# Altium PCB PCB_FB_TOF.PcbDoc
Units mm, origin at the board's own origin, x right, y up, seen from the top; angles counter-clockwise.
Board outline 6.73 x 3.3 mm, 2 copper layers (Top Layer, Bottom Layer); 5 components, 5 nets, 23 pads, 5 vias.
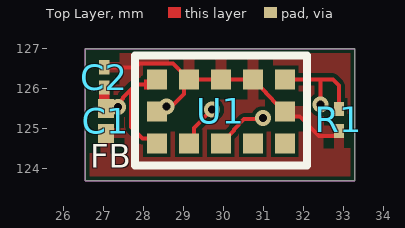
[diagram p0: Top Layer view]
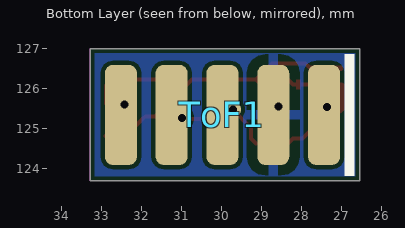
[diagram p1: Bottom Layer view, seen from below]

## Layer stack, top to bottom
Top Solder: solder mask 0.0102, Solder Resist, Dk 3.5
Top Layer: signal copper 0.0356
Dielectric 1: dielectric 0.32, FR-4, Dk 4.8
Bottom Layer: signal copper 0.0356
Bottom Solder: solder mask 0.0102, Solder Resist, Dk 3.5

## Board outline
26.543,123.698 33.274,123.698 33.274,127 26.543,127

## Design rules (kind name [scope] priority, off if disabled: settings)
Clearance [All] p1: gap=0.1 ignorepadtopadclearanceinfootprint=TRUE except(0: Arc-Hole Track-Hole SMDPad-Hole THPad-Hole Via-Hole Fill-Hole Poly-Hole Region-Hole Text-Hole)
PolygonConnect [All] p1: connectstyle=Relief reliefconductorwidth=0.254 reliefentries=4 polygonreliefangle="90 Angle" airgapwidth=0.254
RoutingVias [All] p1: holewidth=0.2 width=0.4 viastyle="Through Hole" minholewidth=0.2 minwidth=0.4 maxholewidth=0.8 maxwidth=1
SolderMaskExpansion [All] p1: expansion=0.102 istentingtop=FALSE
Width [All] p1: maxlimit=0.254 minlimit=0.1 preferedwidth=0.1 minimp=50.000000 maximp=50.000000 favimp=50.000000
30 further rules are at their usual default settings.

## Components (designator, comment, footprint, x,y, rotation, side; value= is the part's Value field where it differs from the comment)
C1 "4.7uF" FP-GRM035-0_09-IPC_B 27.058,125.2 r90 top
C2 "100nF" FP-C0603-030-0_03-IPC_C 27.013,126.286 r90 top
R1 "CRCW020110K0FNED" RESC0603X28X15LL05T05 32.879,125.223 r270 top value=10k
ToF1 "ToF_Front_Back" ToF_Front_Back 29.972,124.079 r180 bottom
U1 "ToF - VL53L1X" TOF 29.934,125.438 r90 top

## Footprints (in the part's own frame and the unit in brackets; to place one, negate y for a bottom-side part, rotate by r counter-clockwise, add the part's x,y. Pads: shape width x height; smd on the part's side, far side on the other; paste and mask are expansions set on the pad)
FP-C0603-030-0_03-IPC_C [mm]
  rect 0.356x0.263 smd paste+0 mask+0: 1(-0.253,0) 2(0.253,0)
  body extent -0.53,-0.27 0.53,0.27, height 0.25
FP-GRM035-0_09-IPC_B [mm]
  rect 0.477x0.403 smd paste+0 mask+0: 1(-0.313,0) 2(0.313,0)
  body extent -0.7,-0.35 0.7,0.35, height 0.25
RESC0603X28X15LL05T05 [mm] "Chip Resistor, 2-Leads, Body 0.60x0.30mm, IPC High Density"
  rect 0.35x0.25 smd: 1(-0.275,0) 2(0.275,0)
  body extent -0.33,-0.17 0.32,0.18, height 0.28
TOF [mm]
  rect 0.5x0.5 smd: 1(0.8,1.6) 2(0.8,0.8) 3(0.8,0) 4(0.8,-0.8) 5(0.8,-1.6) 6(0,-1.6) 7(-0.8,-1.6) 8(-0.8,-0.8) 9(-0.8,0) 10(-0.8,0.8) 11(-0.8,1.6) 12(0,1.6)
  Top Layer region: 0.55,1.8 0.8,1.8 0.8,1.93 0.55,1.93
  silkscreen extent -1.35,-2.15 1.4,2.15, body extent -1.35,-2.42 1.4,2.4, height 1.6
ToF_Front_Back [mm] "1mm pitch"
  rrect50% 0.8x2.5 smd: 1(2.54,1.27) 2(1.27,1.27) 3(0,1.27) 4(-1.27,1.27) 5(-2.54,1.27)

## Part data
C1: library part CMP-06035-019701-1, "Chip Multilayer Ceramic Capacitors for General Purpose, 0201, 4.7uF, X5R, 15%, 20%, 6.3V", Case Code (Imperial)=0201, Case Code (Metric)=0603, Dielectric=X5R, Max Operating Temperature=85°C, Min Operating Temperature=-55°C, Tolerance=20%, Voltage Rating=6.3V, Capacitance=4.7uF, Case/Package=0201, Length=0.024inch, Mount="Surface Mount", Packaging="Tape and Reel", Thickness=0.022inch, Voltage Rating (DC)=6.3V, Width=0.012inch
C2: library part CMP-08246-005139-1, "Multilayer Ceramic Capacitors 100nF ±10% 25V X5R SMD 0201", Case Code (Imperial)=0201, Case Code (Metric)=0603, Dielectric=X5R, Dielectric Material=Ceramic, Max Operating Temperature=85°C, Min Operating Temperature=-55°C, Package Quantity=15000, Tolerance=10%, Voltage Rating=25V, Capacitance=100nF, Case/Package=0201, Depth=0.3mm, Height=0.3mm, Lead Free="Lead Free", Length=0.6mm, Mount="Surface Mount", Packaging="Tape and Reel", REACH SVHC="No SVHC", RoHS Compliant=Yes, Series=C, Termination=SMD/SMT, Thickness=0.013inch, Voltage Rating (DC)=25V, Weight=6E-06oz, Width=0.012inch
R1: library part CMP-2004-00016-1, Manufacturer="Vishay Dale", Part Number=CRCW020110K0FNED
ToF1: Supplier Part Number 1=110990442-ND, Supplier 1=Digi-Key
U1: library part VL53L1X, Manufacturer=STMicroelectronics, Manufacturer Part Number=VL53L1CXV0FY/1, Supplier Part Number 1=497-17764-6-ND, ComponentLink1Description=http://www.farnell.com/datasheets/2600105.pdf?src-supplier=Farnell, ComponentLink1URL=http://www.farnell.com/datasheets/2600105.pdf?src-supplier=Farnell, ComponentLink2Description=http://www.st.com/content/ccc/resource/technical/document/datasheet/group3/7d/85/c8/95/fb/3b/4e/2d/DM00452094/files/DM00452094.pdf/jcr:content/translations/en.DM00452094.pdf?src-supplier=Digi-Key, ComponentLink2URL=http://www.st.com/content/ccc/resource/technical/document/datasheet/group3/7d/85/c8/95/fb/3b/4e/2d/DM00452094/files/DM00452094.pdf/jcr:content/translations/en.DM00452094.pdf?src-supplier=Digi-Key, Pricing 1="1 = 7.07000, 10 = 6.38600, 100 = 5.28660, 500 = 4.60350, 1000 = 4.00950 (USD)", RoHS=No, Stock 1=5939, Supplier 1=Digi-Key

## Via types
v1: diameter 0.4, hole 0.2, Top Layer to Bottom Layer, tented both sides, 5 vias

## Nets (pads, with @x,y where several pads share a name; then routed paths per layer and width w, separated by ;. In a path a pad name is that pad's centre, name@x,y a point inside that pad or via, vN(x,y) a via of type N, cw(c..) or ccw(c..) an arc to the next point about the centre after c; other vN are vias at no path point)
2V8: C1.2 C2.1 ToF1.1 U1.1 U1.11 | length 3.9
  Top Layer w0.1: v1(27.36,125.552) 27.36,125.633 27.486,125.759 27.486,125.784 27.686,125.984 ; U1.11 28.211,124.761 27.972,124.761 27.686,125.047 27.686,125.984 ; U1.1 28.211,126.115 27.817,126.115 27.686,125.984
  Top Layer w0.254: C2.1 27.017,126.028 27.017,125.554 C1.2 27.077,125.533 27.341,125.533 v1(27.36,125.552)
GND: C1.1 C2.2 R1.2 ToF1.2 U1.2 U1.3 U1.4 U1.6 U1.12 | length 8
  Top Layer w0.1: C2.2@27.013,126.492 C2.2 27.794,126.539 27.893,126.638 28.734,126.638 U1.2 ; U1.12 28.457,125.561 28.696,125.561 29.011,125.876 29.011,126.115 U1.2 ; R1.2@32.891,124.826 32.385,124.826 31.942,125.269 31.896,125.315 31.657,125.315 31.411,125.561 31.39,125.561 31.057,125.894 31.057,125.915 U1.4 U1.3 U1.2
  other v1: 28.576,125.561
PULP_I2C.SCL: ToF1.3 U1.10 | length 1.1
  Top Layer w0.1: U1.10 29.257,124.761 29.257,125.021 v1(29.715,125.479)
PULP_I2C.SDA: ToF1.4 U1.9 | length 1.3
  Top Layer w0.1: U1.9 30.257,124.961 30.257,124.982 30.516,125.241 30.956,125.241 v1(30.984,125.269)
XSHUT: R1.1 ToF1.5 U1.5 | length 2.5
  Top Layer w0.1: U1.5 32.385,126.238 ; v1(32.424,125.608) 32.424,126.199 32.385,126.238 ; R1.1@32.879,125.639 32.879,126.089 32.731,126.238 32.385,126.238
pads on no net: U1.7 U1.8

## Polygon pours and split planes (outlines as drawn)
GND on Top Layer "NONET_L-01_P-001" (solid, pour order 1): 33.274,127 33.274,123.698 26.543,123.698 26.543,127
GND on Bottom Layer "NONET_L-01_P-001" (solid, pour order 0): 33.274,127 33.274,123.698 26.543,123.698 26.543,127

## Keep-outs
Keep-Out Layer:
  the board outline again, w0.01

## Silkscreen, mask and mechanical layers (free items; w line width, h text height)
Top Overlay:
  text "FB" at 26.67,123.825 h1.02
Bottom Overlay:
  rectangle: 26.67,123.825 26.924,126.873